# EAGLE board hv0c (EAGLE 9.3.0), part 1 of 2
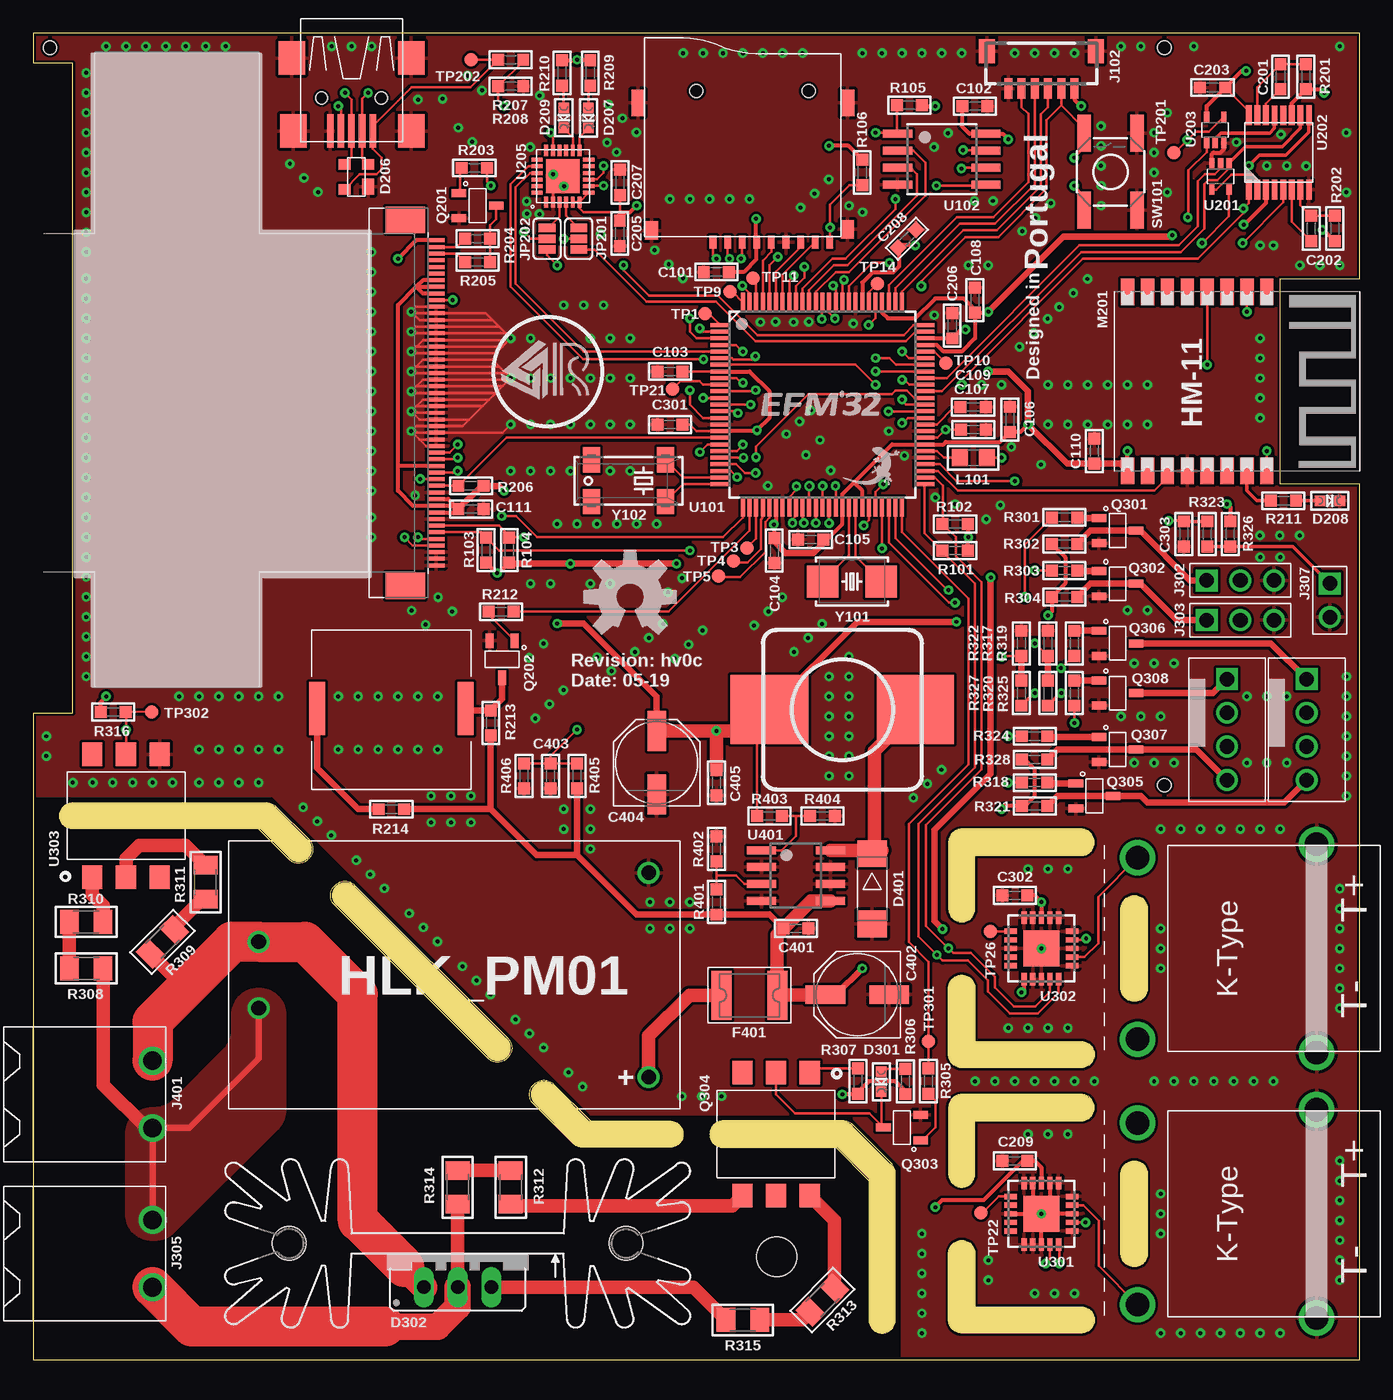
[diagram p0: board, top side]
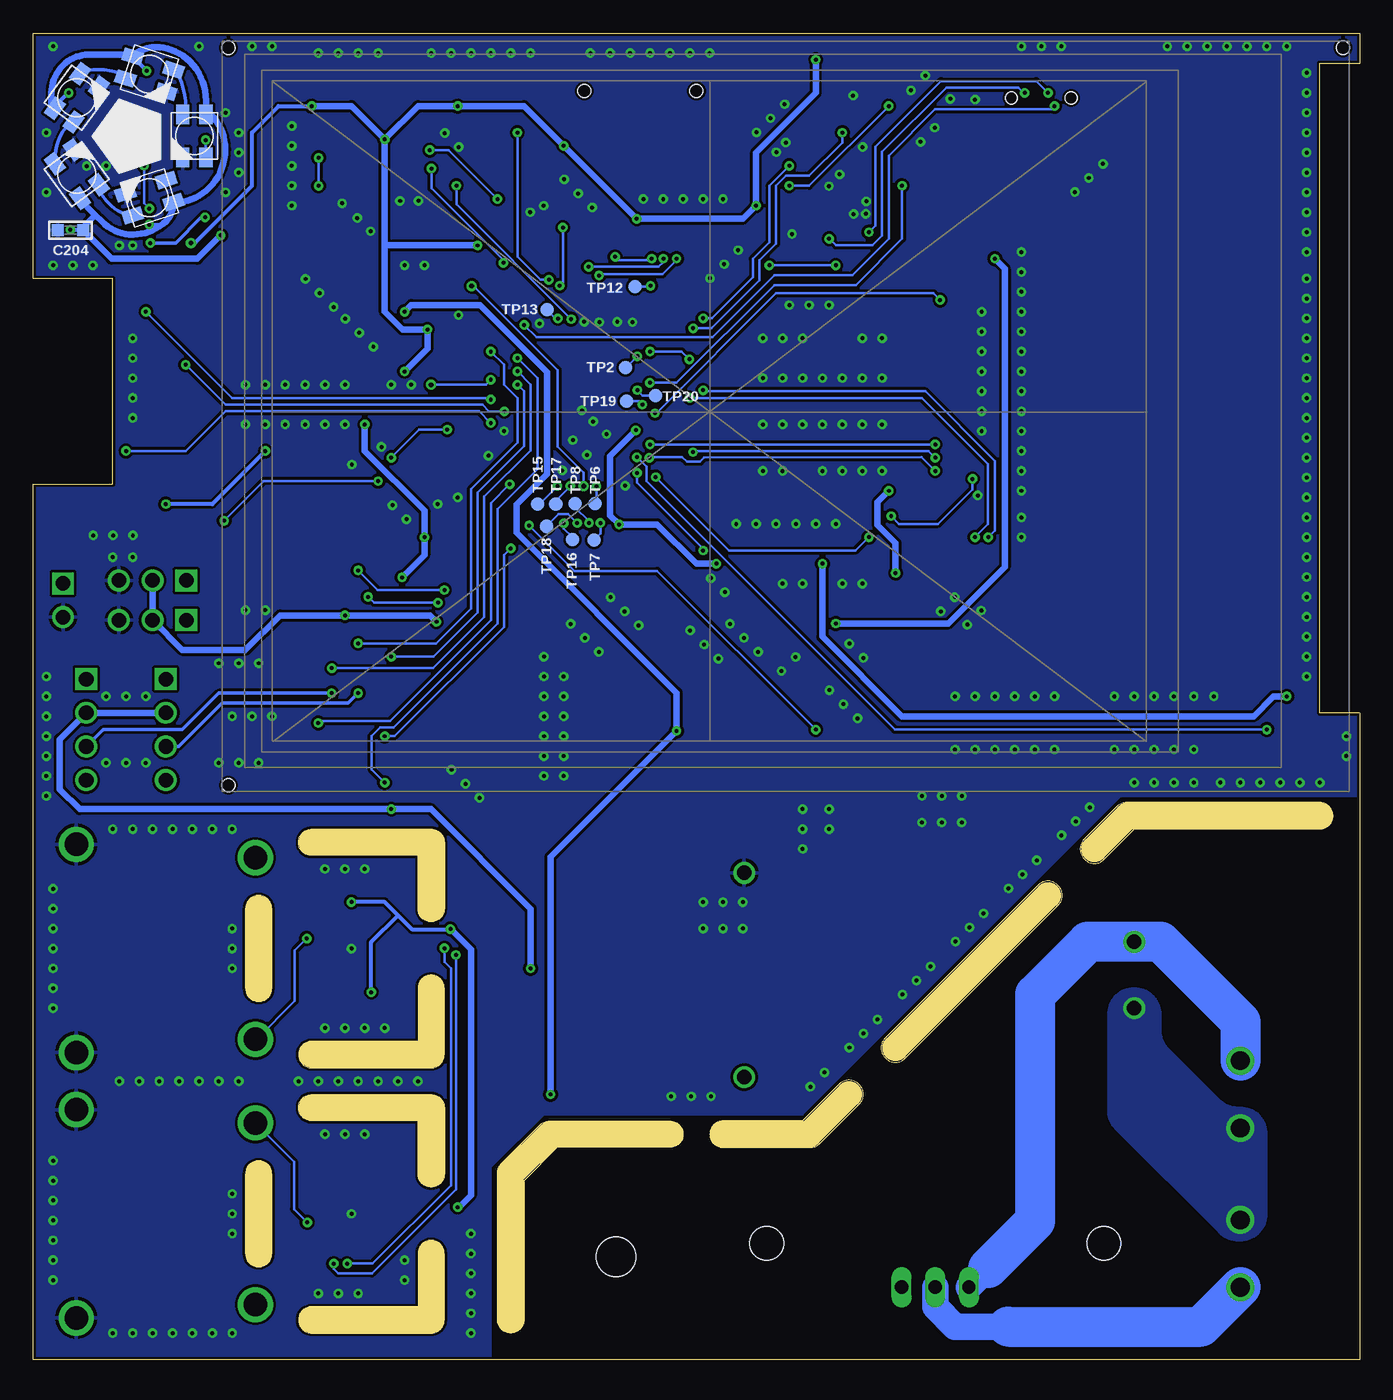
[diagram p1: board, bottom side, seen from below]

Size 100 x 100 mm. Coordinates in mm from the lower left corner, seen from the top.
Outline: 0,0 100,0 100,66 94,66 94,81.5 100,81.5 100,100 0,100 0,97.75 3,97.75 3,48.75 0,48.75 0,0
Copper layers (1*16): Top 0.035mm / dielectric 1.5mm / Bottom 0.035mm
Design rules "default *": minimum track width 5mil, minimum drill 0.3mm, track to track 5mil, track to pad 5mil, pad to pad 5mil, via to via 5mil, smd to smd 5mil, copper to edge 0.2mm, drill to drill 5mil, minimum pad ring 10mil, minimum via ring 8mil, stop-mask expansion 4mil, vias tented up to drill 0.7mm, thermal gap 10mil
Holes 3 mm at 56.05,7.75
tRestrict: area 53.1,4.7 to 59.1,10.7
bRestrict: area 53.1,4.7 to 59.1,10.7
Milling: 18 lines

## Footprints (pad centres in the part's own frame; a part is rotated, then mirrored left to right if it is on the bottom)
HLK-PM01 = drill 1.1: +VO 29.4,-7.7; -VO 29.4,7.7; AC1 0,2.5; AC2 0,-2.5
BUZZ_PIEZO_SMD = smd 1.2 x 4: 1 -5.6,0.1; 2 5.6,0.1
0603_WAVE = smd 0.9 x 0.9: P$1 -0.95,0; P$2 0.95,0
PANASONIC_D = smd 3 x 1.4: + 2.4,0; - -2.4,0
3535 = smd 1 x 1.5: 1 -0.875,-1.619; 2 0.875,-1.619; 3 0.875,1.619; 4 -0.875,1.619
SOT143 = smd 1.2 x 0.9: 1 -0.711,-0.889 | smd 0.8 x 0.9: 2 0.989,-0.889; 3 0.989,0.911; 4 -0.911,0.911
CHIPLED_0603 = smd 0.8 x 0.8: A 0,-0.75; C 0,0.75
TO220DS = drill 1.016 long: A1 -2.54,-2.54; A2 0,-2.54; G 2.54,-2.54
DO214AA = smd 2 x 2.2: A 2.65,0; C -2.65,0
PTC1812 = smd 1.5 x 3.7: P$1 -2.1,0; P$2 2.1,0
MICRO-SD = smd 0.5 x 1: 1 2.25,6.75; 2 1.15,6.75; 3 0.05,6.75; 4 -1.05,6.75; 5 -2.15,6.75; 6 -3.25,6.75; 7 -4.35,6.75; 8 -5.45,6.75; 9 -6.55,6.75 | smd 1 x 1.4: BODY1 -7.89,5.78; BODY4 6.89,5.88 | smd 1 x 2: BODY2 -7.9,-3.75; BODY3 7.9,-3.75 | hole 1: -4.95,-4.65; 3.5,-4.65
SM06B-SSR-H-TB = smd 0.6 x 1.55: 1 -2.5,1.925; 2 -1.5,1.925; 3 -0.5,1.925; 4 0.5,1.925; 5 1.5,1.925; 6 2.5,1.925 | smd 1.2 x 1.8: FIT@1 -4.1,-0.9; FIT@2 4.1,-0.9
USB-M-S1 = smd 2.5 x 0.5: D+ 2.75,0; D- 2.75,0.8; GND 2.75,-1.6; ID 2.75,-0.8; VBUS 2.75,1.6 | smd 2.5 x 2: GND@1 -2.75,-4.5; GND@2 -2.75,4.5; GND@3 2.75,-4.4; GND@4 2.75,4.5 | hole 0.9: 0.25,2.25; 0.25,-2.25
PCC-SMP = drill 1.77: 1-T+ -6.85,-6.75; 2-T- 6.85,-6.75; 3-BAR 7.85,6.75; 4-BAR -7.85,6.75
3X1_2.54 = drill 1.1 square: P$1 -2.54,0 | drill 1.1: P$2 0,0; P$3 2.54,0
2EDG-2P = drill 1.4: P$1 -2.54,0; P$2 2.54,0
KF2510-3+1P = drill 1.1 square: 1 -3.81,0 | drill 1.1: 2 -1.27,0; 3 1.27,0; 4 3.81,0
2X1_2.54 = drill 1.1 square: 1 -1.27,0 | drill 1.1: 2 1.27,0
SMT-JUMPER_3_1-NC_PASTE_SILK = smd 0.635 x 1.27: 1 -0.813,0; 2 0,0; 3 0.813,0
SK104 = hole 2.54: -12.7,-0.762; 12.7,-0.762
_0805 = smd 1.2 x 1.3: 1 -1.016,0; 2 1.016,0
1207 = smd 5.8 x 5.2: 1 -5.5,0 | smd 5.9 x 5.2: 2 5.5,0
HM-11 = smd 2 x 1: 1 0,10.5; 2 0,9; 3 0,7.5; 4 0,6; 5 0,4.5; 6 0,3; 7 0,1.5; 8 0,0; 9 13.5,0; 10 13.5,1.5; 11 13.5,3; 12 13.5,4.5; 13 13.5,6; 14 13.5,7.5; 15 13.5,9; 16 13.5,10.5
SOT-23-3 = smd 0.6 x 1.1: P$1 -0.95,-1.4; P$2 0.95,-1.4; P$3 0,1.4
DIP-6-SMD = smd 1.52 x 1.78: P$1 -2.54,-4.635; P$2 0,-4.635; P$3 2.54,-4.635; P$4 2.54,4.635; P$5 0,4.635; P$6 -2.54,4.635
_1206 = smd 1.4 x 1.8: 1 -1.27,0; 2 1.27,0
PUSH_BUTTON = smd 2.8 x 1: 1 -2.9,2; 2 2.9,2; 3 -2.9,-2; 4 2.9,-2
TEST_POINT = smd 1 x 1: 1 0,0
QFP100 = smd 1.45 x 0.3: 1 -7.7,6; 2 -7.7,5.5; 3 -7.7,5; 4 -7.7,4.5; 5 -7.7,4; 6 -7.7,3.5; 7 -7.7,3; 8 -7.7,2.5; 9 -7.7,2; 10 -7.7,1.5; 11 -7.7,1; 12 -7.7,0.5; 13 -7.7,0; 14 -7.7,-0.5; 15 -7.7,-1; 16 -7.7,-1.5; 17 -7.7,-2; 18 -7.7,-2.5; 19 -7.7,-3; 20 -7.7,-3.5; 21 -7.7,-4; 22 -7.7,-4.5; 23 -7.7,-5; 24 -7.7,-5.5; 25 -7.7,-6; 51 7.7,-6; 52 7.7,-5.5; 53 7.7,-5; 54 7.7,-4.5; 55 7.7,-4; 56 7.7,-3.5; 57 7.7,-3; 58 7.7,-2.5; 59 7.7,-2; 60 7.7,-1.5; 61 7.7,-1; 62 7.7,-0.5; 63 7.7,0; 64 7.7,0.5; 65 7.7,1; 66 7.7,1.5; 67 7.7,2; 68 7.7,2.5; 69 7.7,3; 70 7.7,3.5; 71 7.7,4; 72 7.7,4.5; 73 7.7,5; 74 7.7,5.5; 75 7.7,6 | smd 0.3 x 1.45: 26 -6,-7.7; 27 -5.5,-7.7; 28 -5,-7.7; 29 -4.5,-7.7; 30 -4,-7.7; 31 -3.5,-7.7; 32 -3,-7.7; 33 -2.5,-7.7; 34 -2,-7.7; 35 -1.5,-7.7; 36 -1,-7.7; 37 -0.5,-7.7; 38 0,-7.7; 39 0.5,-7.7; 40 1,-7.7; 41 1.5,-7.7; 42 2,-7.7; 43 2.5,-7.7; 44 3,-7.7; 45 3.5,-7.7; 46 4,-7.7; 47 4.5,-7.7; 48 5,-7.7; 49 5.5,-7.7; 50 6,-7.7; 76 6,7.7; 77 5.5,7.7; 78 5,7.7; 79 4.5,7.7; 80 4,7.7; 81 3.5,7.7; 82 3,7.7; 83 2.5,7.7; 84 2,7.7; 85 1.5,7.7; 86 1,7.7; 87 0.5,7.7; 88 0,7.7; 89 -0.5,7.7; 90 -1,7.7; 91 -1.5,7.7; 92 -2,7.7; 93 -2.5,7.7; 94 -3,7.7; 95 -3.5,7.7; 96 -4,7.7; 97 -4.5,7.7; 98 -5,7.7; 99 -5.5,7.7; 100 -6,7.7
WSOIC8 = smd 0.6 x 2.2: 1 -1.905,-3.33; 2 -0.635,-3.33; 3 0.635,-3.33; 4 1.905,-3.33; 5 1.905,3.33; 6 0.635,3.33; 7 -0.635,3.33; 8 -1.905,3.33
SC-70-5 = smd 0.4 x 0.75: 1 -0.65,-1; 2 0,-1; 3 0.65,-1; 4 0.65,1; 5 -0.65,1
TSSOP-16 = smd 0.45 x 1.5: 1 -2.275,-2.8; 2 -1.625,-2.8; 3 -0.975,-2.8; 4 -0.325,-2.8; 5 0.325,-2.8; 6 0.975,-2.8; 7 1.625,-2.8; 8 2.275,-2.8; 9 2.275,2.8; 10 1.625,2.8; 11 0.975,2.8; 12 0.325,2.796; 13 -0.325,2.796; 14 -0.975,2.8; 15 -1.625,2.8; 16 -2.275,2.8
ZIF50-TFT_BACK = smd 1.3 x 0.3 bottom: 1 55.369,41.54; 2 55.369,41.04; 3 55.369,40.54; 4 55.369,40.04; 5 55.369,39.54; 6 55.369,39.04; 7 55.369,38.54; 8 55.369,38.04; 9 55.369,37.54; 10 55.369,37.04; 11 55.369,36.54; 12 55.369,36.04; 13 55.369,35.54; 14 55.369,35.04; 15 55.369,34.54; 16 55.369,34.04; 17 55.369,33.54; 18 55.369,33.04; 19 55.369,32.54; 20 55.369,32.04; 21 55.369,31.54; 22 55.369,31.04; 23 55.369,30.54; 24 55.369,30.04; 25 55.369,29.54; 26 55.369,29.04; 27 55.369,28.54; 28 55.369,28.04; 29 55.369,27.54; 30 55.369,27.04; 31 55.369,26.54; 32 55.369,26.04; 33 55.369,25.54; 34 55.369,25.04; 35 55.369,24.54; 36 55.369,24.04; 37 55.369,23.54; 38 55.369,23.04; 39 55.369,22.54; 40 55.369,22.04; 41 55.369,21.54; 42 55.369,21.04; 43 55.369,20.54; 44 55.369,20.04; 45 55.369,19.54; 46 55.369,19.04; 47 55.369,18.54; 48 55.369,18.04; 49 55.369,17.54; 50 55.369,17.04 | smd 3 x 2 bottom: M1 57.694,15.5; M2 57.694,43.08 | hole 1: 0.475,56.065; 0.475,0.475; 84.485,56.065
QFN24 = smd 0.3 x 0.85: 1 -1.25,-1.95; 2 -0.75,-1.95; 3 -0.25,-1.95; 4 0.25,-1.95; 5 0.75,-1.95; 6 1.25,-1.95; 13 1.25,1.95; 14 0.75,1.95; 15 0.25,1.95; 16 -0.25,1.95; 17 -0.75,1.95; 18 -1.25,1.95 | smd 0.85 x 0.3: 7 1.95,-1.25; 8 1.95,-0.75; 9 1.95,-0.25; 10 1.95,0.25; 11 1.95,0.75; 12 1.95,1.25; 19 -1.95,1.25; 20 -1.95,0.75; 21 -1.95,0.25; 22 -1.95,-0.25; 23 -1.95,-0.75; 24 -1.95,-1.25 | smd 2.55 x 2.55: PAD 0,0
TQFN20-5X5 = smd 0.95 x 0.4: 1 -2.325,1.3; 2 -2.325,0.65; 3 -2.325,0; 4 -2.325,-0.65; 5 -2.325,-1.3; 11 2.325,-1.3; 12 2.325,-0.65; 13 2.325,0; 14 2.325,0.65; 15 2.325,1.3 | smd 0.4 x 0.95: 6 -1.3,-2.325; 7 -0.65,-2.325; 8 0,-2.325; 9 0.65,-2.325; 10 1.3,-2.325; 16 1.3,2.325; 17 0.65,2.325; 18 0,2.325; 19 -0.65,2.325; 20 -1.3,2.325 | smd 2.7 x 2.7: EXP 0,0
SOIC8 = smd 0.6 x 2.2: 1 -1.905,-2.6; 2 -0.635,-2.6; 3 0.635,-2.6; 4 1.905,-2.6; 5 1.905,2.6; 6 0.635,2.6; 7 -0.635,2.6; 8 -1.905,2.6
2-SMD-5X3 = smd 2.4 x 2.4: 1 -2.2,0; 2 2.2,0
CM200S = smd 1.3 x 1.9: 1 -2.794,-1.574; 2 2.794,-1.574; 3 2.794,1.574; 4 -2.794,1.574

## Placement (x,y rotation side)
ACDC401  HLK-PM01  [HLK-PM01]  17,29 0 top
B201  [BUZZ_PIEZO_SMD]  27,49 0 top
C101  100n  [0603_WAVE]  51.5,82 180 top
C102  100n  [0603_WAVE]  71,94.5 0 top
C103  100n  [0603_WAVE]  48,74.5 180 top
C104  100n  [0603_WAVE]  55.87,60.99 270 top
C105  100n  [0603_WAVE]  58.61,61.82 180 top
C106  1u  [0603_WAVE]  73.63,70.88 90 top
C107  4u7  [0603_WAVE]  70.87,70.11 0 top
C108  1u  [0603_WAVE]  71,79.88 90 top
C109  1u  [0603_WAVE]  70.86,71.8 0 top
C110  100n  [0603_WAVE]  80,68.5 90 top
C111  100n  [0603_WAVE]  33,64.12 0 top
C201  100p  [0603_WAVE]  94.03,96.72 90 top
C202  100p  [0603_WAVE]  96.34,85.28 90 top
C203  [0603_WAVE]  88.91,95.91 180 top
C204  [0603_WAVE]  97.19,85.14 180 bottom
C205  [0603_WAVE]  44.22,84.9 270 top
C206  [0603_WAVE]  69.28,77.94 90 top
C207  [0603_WAVE]  44.25,88.75 90 top
C208  [0603_WAVE]  65.88,84.5 45 top
C209  [0603_WAVE]  74,15 180 top
C301  [0603_WAVE]  48,70.5 180 top
C302  [0603_WAVE]  74,35 180 top
C303  [0603_WAVE]  86.75,62.25 270 top
C401  100n  [0603_WAVE]  57.5,32.5 0 top
C402  [PANASONIC_D]  62.12,27.52 180 top
C403  [0603_WAVE]  39,44 270 top
C404  100u  [PANASONIC_D]  47,45 90 top
C405  100n  [0603_WAVE]  51.5,43.5 270 top
D201  WS2812B  [3535]  87.85,92.25 0 bottom
D202  WS2812B  [3535]  91.23,96.91 72 bottom
D203  WS2812B  [3535]  96.71,95.13 144 bottom
D204  WS2812B  [3535]  96.71,89.37 216 bottom
D205  WS2812B  [3535]  91.23,87.59 288 bottom
D206  SP0503BAHT  [SOT143]  24.38,89.12 90 top
D207  LED0603  [CHIPLED_0603]  41.86,93.61 180 top
D208  LED0603  [CHIPLED_0603]  97.75,64.75 270 top
D209  LED0603  [CHIPLED_0603]  40,93.62 180 top
D301  LED0603  [CHIPLED_0603]  63.94,20.96 180 top
D302  BTA16  [TO220DS]  32,8 0 top
D401  SK54L  [DO214AA]  63.25,35.5 270 top
F401  1A  [PTC1812]  54,27.48 180 top
J101  MICROSD  [MICRO-SD]  53.5,91 180 top
J102  SH-6  [SM06B-SSR-H-TB]  76,97.75 180 top
J201  USB-SHIELD  [USB-M-S1]  24,95.38 270 top
J301  PCC-SMP  [PCC-SMP]  90,11 270 top
J302  3X1_2.54  [3X1_2.54]  91,58.75 0 top
J303  3X1_2.54  [3X1_2.54]  91,55.75 0 top
J304  PCC-SMP  [PCC-SMP]  90,31 270 top
J305  2EDG-2P  [2EDG-2P]  9,8 270 top
J306  4P-PC-FAN  [KF2510-3+1P]  96,47.5 270 top
J307  2X1_2.54  [2X1_2.54]  97.75,57.25 270 top
J308  4P-PC-FAN  [KF2510-3+1P]  90,47.5 270 top
J401  2EDG-2P  [2EDG-2P]  9,20 270 top
JP201  JUMPER-SMT_3_1-NC_PASTE_SILK  [SMT-JUMPER_3_1-NC_PASTE_SILK]  41.13,84.5 90 top
JP202  JUMPER-SMT_3_1-NC_PASTE_SILK  [SMT-JUMPER_3_1-NC_PASTE_SILK]  38.75,84.5 90 top
KK301  SK104  [SK104]  32,8 180 top
L101  4.7nH  [_0805]  70.87,68 180 top
L401  68uH  [1207]  61,49 180 top
LOGO101  DESIGNEDINPT  [DESIGNEDINPT]  76.5,81.5 90 top
LOGO102  RAFAEL_SILVA  [RAFAEL_SILVA_5MM_ALT_3]  36.05,74.38 0 top
LOGO103  OSHW-LOGOL  [OSHW-LOGO-L]  45,57.5 0 top
M201  HM-11  [HM-11]  82.5,80.5 270 top
Q201  BC817-40  [SOT-23-3]  33.5,87 270 top
Q202  BC817-40  [SOT-23-3]  35.35,52.81 180 top
Q301  BC817-40  [SOT-23-3]  81.75,62.5 270 top
Q302  BC817-40  [SOT-23-3]  81.75,58.5 270 top
Q303  BC817-40  [SOT-23-3]  65.5,17.5 90 top
Q304  MOC3051  [DIP-6-SMD]  56,17 180 top
Q305  BC817-40  [SOT-23-3]  80,42.5 270 top
Q306  BC817-40  [SOT-23-3]  81.75,54 270 top
Q307  BC817-40  [SOT-23-3]  81.75,46 270 top
Q308  BC817-40  [SOT-23-3]  81.75,50.25 270 top
R101  [0603_WAVE]  69.5,61 0 top
R102  [0603_WAVE]  69.5,63 0 top
R103  [0603_WAVE]  34.14,61.03 270 top
R104  [0603_WAVE]  35.89,61.03 270 top
R105  [0603_WAVE]  66.05,94.56 0 top
R106  [0603_WAVE]  62.5,89.5 90 top
R201  3k95  [0603_WAVE]  95.94,96.72 90 top
R202  3k95  [0603_WAVE]  98.12,85.28 90 top
R203  [0603_WAVE]  33.26,89.84 180 top
R204  [0603_WAVE]  33.5,84.5 180 top
R205  [0603_WAVE]  33.5,82.75 180 top
R206  [0603_WAVE]  33,65.88 0 top
R207  22.1k  [0603_WAVE]  36,98 180 top
R208  47.5k  [0603_WAVE]  36,96 180 top
R209  [0603_WAVE]  42,97 270 top
R210  [0603_WAVE]  39.88,97 270 top
R211  [0603_WAVE]  94.25,64.75 0 top
R212  [0603_WAVE]  35.27,56.38 180 top
R213  [0603_WAVE]  34.5,48 270 top
R214  [0603_WAVE]  27,41.5 0 top
R301  [0603_WAVE]  77.75,63.5 0 top
R302  [0603_WAVE]  77.75,61.5 180 top
R303  [0603_WAVE]  77.75,59.5 0 top
R304  [0603_WAVE]  77.75,57.5 180 top
R305  [0603_WAVE]  67.5,21 270 top
R306  [0603_WAVE]  65.74,20.97 90 top
R307  [0603_WAVE]  62.16,21 270 top
R308  54.9k  [_1206]  4,29.5 180 top
R309  54.9k  [_1206]  9.75,31.5 45 top
R310  54.9k  [_1206]  4,33 0 top
R311  54.9k  [_1206]  13,36 90 top
R312  [_1206]  36,13 90 top
R313  [_1206]  59.5,4.5 225 top
R314  [_1206]  32,13 270 top
R315  [_1206]  53.5,3 180 top
R316  10k  [0603_WAVE]  6.03,48.82 180 top
R317  [0603_WAVE]  76.5,54 270 top
R318  [0603_WAVE]  75.5,43.5 0 top
R319  [0603_WAVE]  78.5,54 90 top
R320  [0603_WAVE]  76.5,50.25 270 top
R321  [0603_WAVE]  75.5,41.75 180 top
R322  [0603_WAVE]  74.5,54 270 top
R323  [0603_WAVE]  88.5,62.25 90 top
R324  [0603_WAVE]  75.5,47 0 top
R325  [0603_WAVE]  78.5,50.25 90 top
R326  [0603_WAVE]  90.25,62.25 90 top
R327  [0603_WAVE]  74.5,50.25 270 top
R328  [0603_WAVE]  75.5,45.25 180 top
R401  10M  [0603_WAVE]  51.5,34.5 270 top
R402  10k  [0603_WAVE]  51.5,38.5 270 top
R403  3.01k  [0603_WAVE]  55.5,41 180 top
R404  1k  [0603_WAVE]  59.5,41 180 top
R405  [0603_WAVE]  41,44 270 top
R406  [0603_WAVE]  37,44 90 top
SW101  [PUSH_BUTTON]  81.22,89.55 90 top
TP1  TEST_POINT  [TEST_POINT]  50.65,78.87 0 top
TP2  TEST_POINT  [TEST_POINT]  55.33,74.78 0 bottom
TP3  TEST_POINT  [TEST_POINT]  53.81,61.2 90 top
TP4  TEST_POINT  [TEST_POINT]  52.79,60.19 0 top
TP5  TEST_POINT  [TEST_POINT]  51.67,59.07 0 top
TP6  TEST_POINT  [TEST_POINT]  57.66,64.53 0 bottom
TP7  TEST_POINT  [TEST_POINT]  57.72,61.79 0 bottom
TP8  TEST_POINT  [TEST_POINT]  59.14,64.53 0 bottom
TP9  TEST_POINT  [TEST_POINT]  52.52,80.52 0 top
TP10  TEST_POINT  [TEST_POINT]  68.81,75.11 0 top
TP11  TEST_POINT  [TEST_POINT]  54.26,81.55 0 top
TP12  TEST_POINT  [TEST_POINT]  54.65,80.89 0 bottom
TP13  TEST_POINT  [TEST_POINT]  61.28,79.16 0 bottom
TP14  TEST_POINT  [TEST_POINT]  63.65,81.13 0 top
TP15  TEST_POINT  [TEST_POINT]  61.99,64.51 270 bottom
TP16  TEST_POINT  [TEST_POINT]  59.33,61.83 270 bottom
TP17  TEST_POINT  [TEST_POINT]  60.6,64.52 270 bottom
TP18  TEST_POINT  [TEST_POINT]  61.31,62.82 270 bottom
TP19  TEST_POINT  [TEST_POINT]  55.26,72.25 180 bottom
TP20  TEST_POINT  [TEST_POINT]  53.08,72.68 180 bottom
TP21  TEST_POINT  [TEST_POINT]  48.19,73.15 180 top
TP22  TEST_POINT  [TEST_POINT]  71.46,11.06 0 top
TP26  TEST_POINT  [TEST_POINT]  72.14,32.29 90 top
TP201  TEST_POINT  [TEST_POINT]  86,91 90 top
TP202  TEST_POINT  [TEST_POINT]  33,98 90 top
TP301  TEST_POINT  [TEST_POINT]  67.5,24 0 top
TP302  TEST_POINT  [TEST_POINT]  8.95,48.82 270 top
U101  EFM32GG11B8XX_Q100  [QFP100]  59.5,72 0 top
U102  SST26VF064B  [WSOIC8]  68.5,90.5 270 top
U201  74LVC1G08  [SC-70-5]  89.5,89.2 180 top
U202  74HC123  [TSSOP-16]  93.91,91 0 top
U203  74LVC1G32  [SC-70-5]  89.11,92.71 0 top
U204  ER-TFT035-6BOT  [ZIF50-TFT_BACK]  85.75,42.84 0 bottom
U205  CP2102N  [QFN24]  39.93,89.21 0 top
U301  MCP9600  [TQFN20-5X5]  76,11 180 top
U302  MCP9600  [TQFN20-5X5]  76,31 180 top
U303  H11AA1  [DIP-6-SMD]  7,41 0 top
U401  MIC4682  [SOIC8]  57.5,36.5 270 top
Y101  8MHz  [2-SMD-5X3]  61.72,58.67 180 top
Y102  32.768KHz  [CM200S]  44.88,66.25 180 top

## Library data of the parts
ACDC401 = Power > AC\DC Converters
B201 = Eletromechanical > Buzzer
C101-C111 C201-C209 C301-C303 C401 C403 C405 = Passive Components > Capacitors > Multilayer Ceramic Capacitors MLCC
C402 C404 = Passive Components > Capacitors > Aluminium Electrolytic Capacitors
D201-D205 D207-D209 D301 = Opto-electronics > LED Emitters
D206 = Circuit Protection > ESD Suppressors \ TVS Diodes
D302 = Semiconductors > Discrete Semiconductors > Thyristors > Triacs
D401 = Semiconductors > Discrete Semiconductors > Diodes & Rectifiers > Schottky Diodes & Rectifiers
F401 = Circuit Protection > Resettable Fuses - PPTC
J101 = Connectors > card socket
J102 = Connectors > JST > SH
J201 = Connectors > USB
J301 J304 J305 J401 = Connectors > Other
J302 J303 J307 = Connectors > Header
J306 J308 = Thermal Management > Fans & Blowers
JP201 JP202 TP1-TP22 TP26 TP201 TP202 TP301 TP302 = Utility > Board
KK301 = Thermal Management > Heatsinks
L101 L401 = Passive Components > Inductors, Chokes & Coils
LOGO101-LOGO103 = Utility > Silkscreen
M201 = Embedded > BLE Module
Q201 Q202 Q301-Q303 Q305-Q308 = Semiconductors > Discrete Semiconductors > Transistors > Bipolar Transistors - BJT
Q304 U303 = Opto-electronics > Optocouplers\Photocouplers
R101-R106 R201-R214 R301-R328 R401-R406 = Passive Components > Resistors > Chip Resistors
SW101 = Eletromechanical > Switches > Tactile Switches
U101 = Semiconductors > Embedded Processors & Controllers > Microcontrollers - MCU
U102 = Semiconductors > Integrated Circuits - ICs > Memory ICs > Flash
U201-U203 = Semiconductors > Integrated Circuits - ICs > Logic ICs > Logic Gates
U204 = Opto-electronics > Displays
U205 = Semiconductors > Integrated Circuits - ICs > Interface ICs > USB Interface IC
U301 U302 = Sensors > Temperature Sensors
U401 = Power > Switching Controllers
Y101 Y102 = Passive Components > Frequency Control & Timing Devices > Crystals

## Nets
2.8V: C101.P$1 C102.P$1 C103.P$1 C104.P$1 C105.P$1 C106.P$1 C110.P$1 C111.P$1 C205.P$1 C206.P$1 C207.P$1 C208.P$1 C209.P$1 C301.P$1 C302.P$1 J101.4 J102.1 M201.9 R101.P$2 R102.P$2 R103.P$2 R104.P$2 R105.P$2 R106.P$2 R206.P$2 R209.P$1 R210.P$1 R316.P$2 R326.P$2 U101.8 U101.17 U101.31 U101.41 U101.44 U101.57 U101.73 U101.82 U102.8 U201.5 U204.7 U204.8 U204.9 U204.35 U204.40 U204.41 U204.42 U205.5 U205.6 U205.7 U301.8 U302.8 U302.16
5V: C108.P$1 C203.P$1 C204.P$1 C404.+ C405.P$1 D201.3 D202.3 D203.3 D204.3 D205.3 J302.P$2 J303.P$2 L401.2 R201.P$1 R202.P$1 R302.P$2 R304.P$2 R306.P$1 R307.P$2 R403.P$2 U101.72 U101.79 U202.3 U202.11 U202.16 U203.5 U204.1
5V-FB: R403.P$1 R404.P$2 U401.1
12V: C401.P$1 C402.+ F401.P$1 J306.2 J308.2 R213.P$2 R214.P$2 R321.P$2 R328.P$2 R401.P$2 R405.P$2 U401.5
12V-FB: C403.P$1 R405.P$1 R406.P$2 U101.45
!LED-CS: U101.66 U202.1 U202.9
!RESET: J102.2 SW101.1 SW101.2 U101.36
!TFT_RESET: U101.14 U204.10
!TTFT-IRQ: U101.12 U204.46
!TTFT-RST: U101.15 U204.47
AC-L: ACDC401.AC2 J305.P$1 J401.P$2 R308.1
AC-N: ACDC401.AC1 D302.A1 J401.P$1 R309.1
BLE-!RST: M201.11 U101.53
BLE-KEY: M201.16 U101.61
D8-DI: D201.2 TP201.1 U203.4
D8_DO: D201.4 D202.2
D9-DO: D202.4 D203.2
D10-DO: D203.4 D204.2
D11-DO: D204.4 D205.2
DECOUPLE: C109.P$1 U101.60
DOOR-SW: C303.P$1 R323.P$2 U101.54
DVDD: C107.P$1 L101.1 U101.58
GND: ACDC401.-VO C101.P$2 C102.P$2 C103.P$2 C104.P$2 C105.P$2 C106.P$2 C107.P$2 C108.P$2 C109.P$2 C110.P$2 C111.P$2 C203.P$2 C204.P$2 C205.P$2 C206.P$2 C207.P$2 C208.P$2 C209.P$2 C301.P$2 C302.P$2 C303.P$2 C401.P$2 C402.- C403.P$2 C404.- C405.P$2 D201.1 D202.1 D203.1 D204.1 D205.1 D206.1 D208.C D401.A J101.6 J101.BODY1 J101.BODY2 J101.BODY3 J101.BODY4 J102.6 J102.FIT@1 J102.FIT@2 J201.GND J201.GND@1 J201.GND@2 J201.GND@3 J201.GND@4 J301.3-BAR J301.4-BAR J302.P$3 J303.P$3 J304.3-BAR J304.4-BAR J307.2 M201.12 Q201.P$2 Q202.P$2 Q301.P$2 Q302.P$2 Q303.P$2 Q305.P$2 Q306.P$2 Q307.P$2 Q308.P$2 R208.P$1 R317.P$1 R322.P$1 R402.P$1 R404.P$1 R406.P$1 SW101.3 SW101.4 U101.16 U101.32 U101.55 U101.59 U101.83 U102.4 U201.3 U202.8 U203.3 U204.11 U204.12 U204.13 U204.14 U204.15 U204.16 U204.17 U204.18 U204.19 U204.20 U204.21 U204.22 U204.23 U204.24 U204.25 U204.26 U204.27 U204.28 U204.29 U204.30 U204.31 U204.32 U204.39 U204.43 U204.48 U204.49 U204.50 U205.2 U205.PAD U301.1 U301.3 U301.5 U301.6 U301.7 U301.9 U301.10 U301.13 U301.16 U301.17 U301.18 U301.EXP U302.1 U302.3 U302.5 U302.6 U302.7 U302.9 U302.10 U302.13 U302.17 U302.18 U302.EXP U303.P$4 U401.2 U401.4 U401.6 U401.7
I2C0-SCL-SENS: R102.P$1 U101.52 U301.19 U302.19
I2C0-SDA-SENS: R101.P$1 U101.51 U301.20 U302.20
I2C1-SCL-TTFT: R104.P$1 U101.23 U204.44
I2C1-SDA-TTFT: R103.P$1 U101.22 U204.45
MAIN_HFXTAL_N: U101.43 Y101.1
MAIN_HFXTAL_P: U101.42 Y101.2
MAIN_LFXTAL_N: U101.25 Y102.4
MAIN_LFXTAL_P: U101.24 Y102.1
N$1: J307.1 R323.P$1 R326.P$1
N$2: D302.A2 J305.P$2 R314.2
N$4: B201.1 R214.P$1
N$5: Q303.P$1 R305.P$2
N$7: D301.C Q303.P$3 Q304.P$2
N$13: D207.C U205.13
N$15: D209.C U205.14
N$16: D209.A R210.P$2
N$17: B201.2 Q202.P$3 R213.P$1
N$18: Q202.P$1 R212.P$2
N$19: D207.A R209.P$2
N$20: R308.2 R310.1
N$21: R310.2 U303.P$1
N$25: Q201.P$1 R203.P$2
N$29: R311.2 U303.P$2
N$30: R309.2 R311.1
N$31: ACDC401.+VO F401.P$2
N$34: Q304.P$1 R307.P$1
N$35: D208.A R211.P$2
N$36: M201.15 R211.P$1
N$37: Q304.P$4 R312.1
N$38: Q304.P$6 R313.1
N$39: R312.2 R314.1
N$40: R313.2 R315.1
N$42: D302.G R315.2
N$45: D401.C L401.1 U401.8
N$47: R401.P$1 R402.P$2 U401.3
N$49: Q301.P$1 R301.P$2
N$50: J302.P$1 Q301.P$3 R302.P$1
N$51: D301.A R306.P$2
N$52: J303.P$1 Q302.P$3 R304.P$1
N$53: Q302.P$1 R303.P$2
N$56: Q306.P$1 R319.P$2
N$57: J306.1 Q306.P$3
N$58: Q305.P$1 R318.P$2
N$59: J306.4 Q305.P$3 R321.P$1
N$60: Q308.P$1 R325.P$2
N$61: Q307.P$1 R324.P$2
N$62: J308.4 Q307.P$3 R328.P$1
N$63: J308.1 Q308.P$3
N$64: J306.3 R320.P$2
N$65: J308.3 R327.P$2
N$69: U202.5 U203.1
N$77: U202.13 U203.2
N$78: U201.4 U202.2
N$84: D206.3 J201.D+ JP202.2
N$85: D206.2 J201.D- JP201.2
PA0: TP1.1 U101.1
PA5: TP2.1 U101.6
PA9: TP3.1 U101.28
PA10: TP4.1 U101.29
PA11: TP5.1 U101.30
PA12: TP6.1 U101.33
PA13: TP7.1 U101.34
PA14: TP8.1 U101.35
PA15: TP9.1 U101.100
PB1: TP21.1 U101.10
PB2: TP20.1 U101.11
PB4: TP19.1 U101.13
PB9: TP18.1 U101.37
PB10: TP17.1 U101.38
PB11: TP16.1 U101.39
PB12: TP15.1 U101.40
PC11: TP10.1 U101.71
PE14: TP11.1 U101.98
PE15: TP12.1 U101.99
PF5: TP14.1 U101.81
PF9: TP13.1 U101.87
PRS-CH11-SSR-OUT: R305.P$1 TP301.1 U101.50
QSPI_CLK: U101.84 U102.6
QSPI_CS0: R105.P$1 U101.85 U102.1
QSPI_D0: U101.88 U102.5
QSPI_D1: U101.89 U102.2
QSPI_D2: U101.90 U102.3
QSPI_D3: U101.91 U102.7
SDIO-CD: J101.9 R106.P$1 U101.86
SDIO-CLK: J101.5 U101.97
SDIO-CMD: J101.3 U101.96
SDIO-DAT0: J101.7 U101.95
SDIO-DAT1: J101.8 U101.94
SDIO-DAT2: J101.1 U101.93
SDIO-DAT3: J101.2 U101.92
SWCLK: J102.3 U101.76
SWDIO: J102.4 U101.77
SWO: J102.5 U101.78
TC_VIN0+: J301.1-T+ U301.2
TC_VIN0-: J301.2-T- U301.4
TC_VIN1+: J304.1-T+ U302.2
TC_VIN1-: J304.2-T- U302.4
TFT-DC: U101.26 U204.37
TFT-LEDK: Q201.P$3 R204.P$1 R205.P$1
TFT-LEDK1: R204.P$2 U204.2
TFT-LEDK2: R205.P$2 U204.3
TIM0-CC0-BUZZ: R212.P$1 U101.27
TIM1-CC0-TFT-BL: R203.P$1 U101.9
TIM2-CC2FAN0-SNSE: R317.P$2 R320.P$1 U101.70
TIM3-CC0-FAN1-SNSE: R322.P$2 R327.P$1 U101.7
TIM5-CC0-FAN0-GND: R319.P$1 U101.68
TIM5-CC1-FAN0-CTRL: R318.P$1 U101.69
TIM6-CC0-FAN1-GND: R325.P$1 U101.46
TIM6-CC1-FAN1-CTRL: R324.P$1 U101.47
U0RX-USB-TX: U101.5 U205.21
U0TX-USB-RX: U101.4 U205.20
U1RX-BLE-TX: M201.2 U101.63
U1TX-BLE-RX: M201.4 U101.62
U4-ALRT1: TP22.1 U301.11
U4-ALRT2: U301.12
U4-ALRT3: U301.14
U4-ALRT4: U301.15
U7-ALRT1: TP26.1 U302.11
U7-ALRT2: U302.12
U7-ALRT3: U302.14
U7-ALRT4: U302.15
U11.1-C: C201.P$1 U202.14
U11.1-RC: C201.P$2 R201.P$2 U202.15
U11.2-C: C202.P$1 U202.6
U11.2-RC: C202.P$2 R202.P$2 U202.7
UART_VBUS: R207.P$1 R208.P$2 U205.8
US0-LED-MOSI: U101.67 U201.2
US0-LED-SCK: U101.65 U201.1 U202.10
US1-CLK-TFT: U101.21 U204.36
US1-CS-TFT: R206.P$1 U101.18 U204.38
US1-MISO-TFT: U101.20 U204.33
US1-MOSI-TFT: U101.19 U204.34
USB-D+: JP202.1 U101.75
USB-D-: JP201.1 U101.74
USB-ID: J201.ID U101.80
USB-RST: U101.3 U205.9
USB-SUS: U101.2 U205.17
USB-UART-D+: JP202.3 U205.3
USB-UART-D-: JP201.3 U205.4
V_USB: D206.4 J201.VBUS R207.P$2 TP202.1
VREGSW: L101.2 U101.56
WTIM1-CC1-ZERO-CROSS: R316.P$1 TP302.1 U101.64 U303.P$5
WTIM2-CC0-SERVO0-SIG: R301.P$1 U101.48
WTIM2-CC1-SERVO1-SIG: R303.P$1 U101.49